# Altium PCB KT603DEMO.PcbDoc
Units mm, origin at the board's own origin, x right, y up, seen from the top; angles counter-clockwise.
Board outline 57.89 x 27.2 mm, 2 copper layers (Top Layer, Bottom Layer); 56 components, 52 nets, 179 pads, 88 vias.
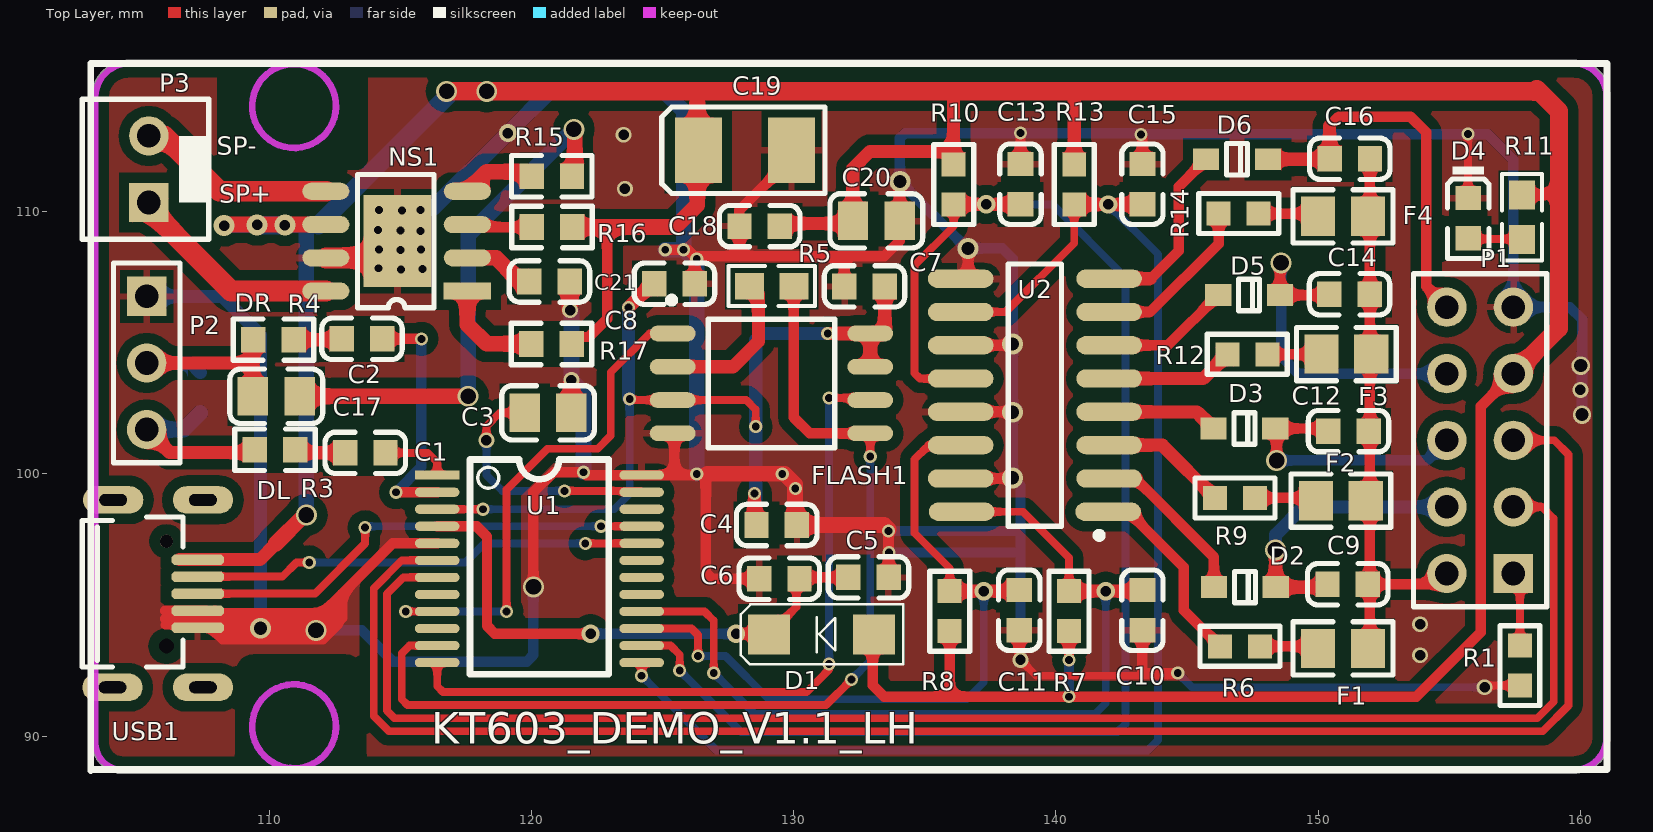
[diagram p0: Top Layer view]
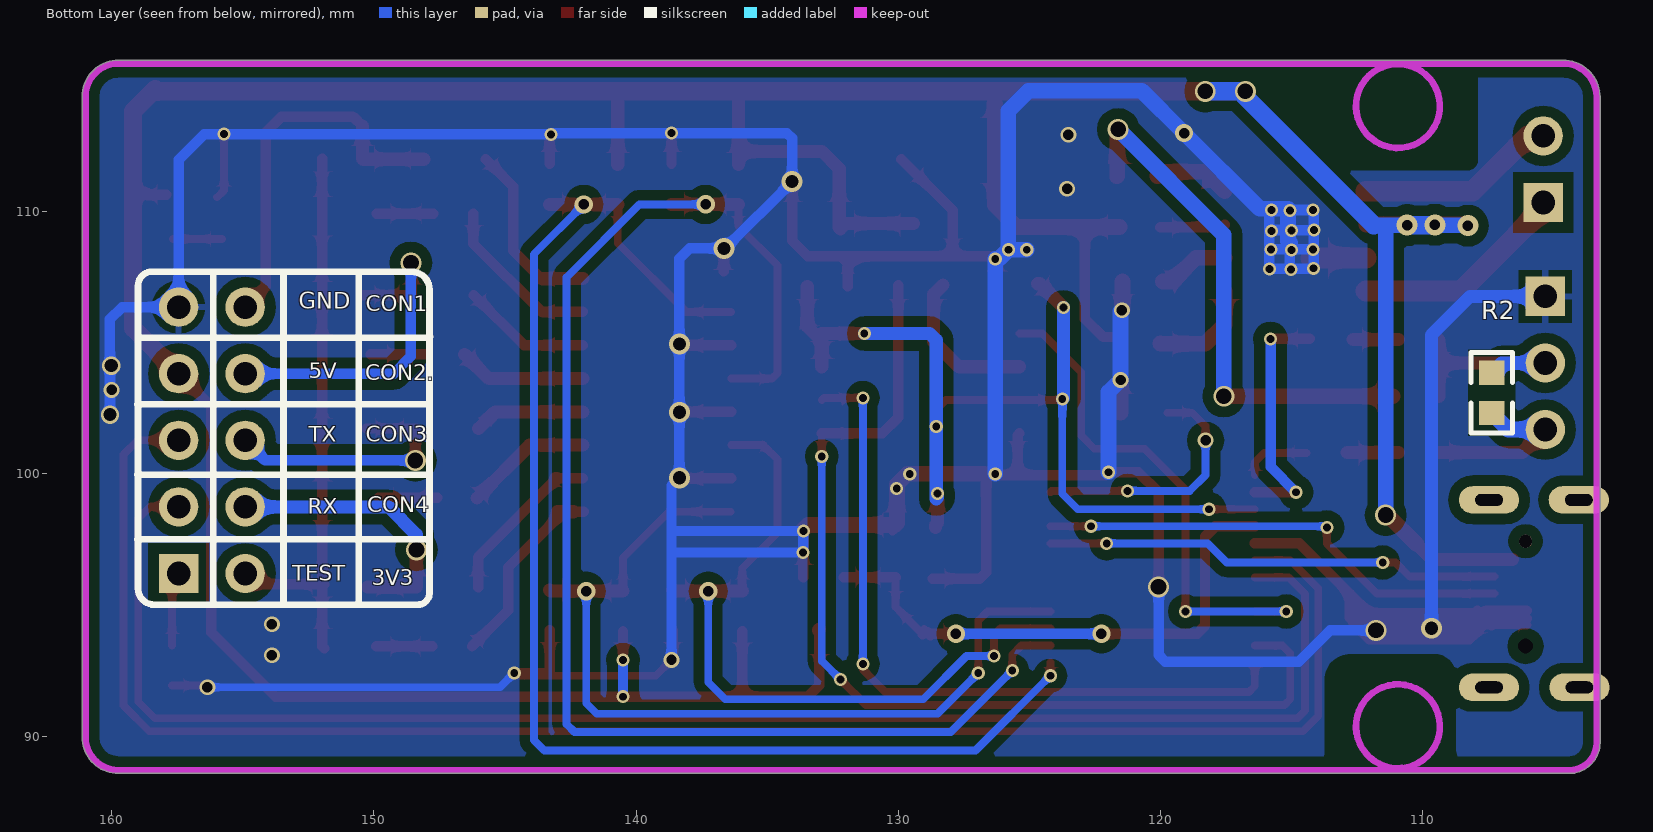
[diagram p1: Bottom Layer view, seen from below]
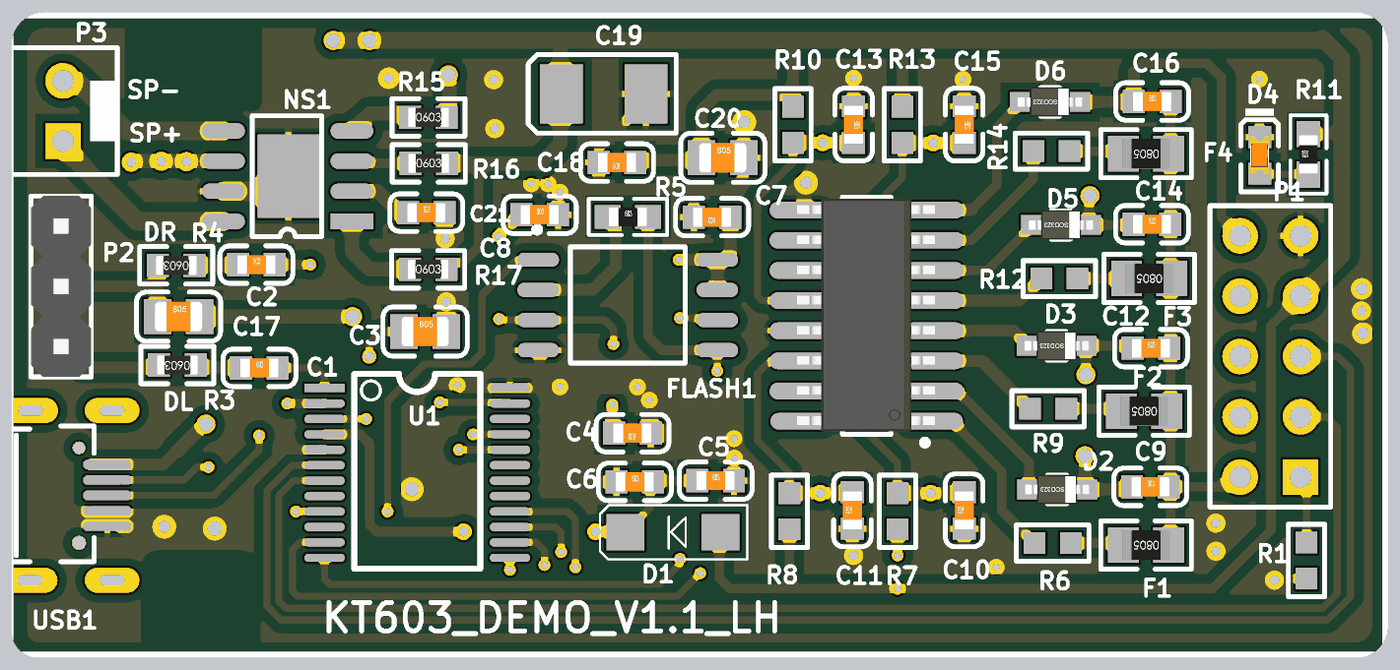
[diagram p2: 3D render of the assembled board from above, using the file's embedded part models]

## Layer stack, top to bottom
Top Solder: solder mask 0.0102, Solder Resist, Dk 3.5
Top Layer: signal copper 0.0356
Dielectric 1: dielectric 0.32, FR-4, Dk 4.8
Bottom Layer: signal copper 0.0356
Bottom Solder: solder mask 0.0102, Solder Resist, Dk 3.5

## Board outline
103.233,89.74 ccw(c104.4,89.74) 104.4,88.573 159.75,88.573 ccw(c159.75,89.95) 161.127,89.95 161.127,114.4 ccw(c159.75,114.4) 159.75,115.777 104.63,115.777 ccw(c104.63,114.38) 103.233,114.38

## Design rules (kind name [scope] priority, off if disabled: settings)
Clearance Clearance-poly [InPolygon] p1: gap=0.4
Clearance Clearance-track [All] p2: gap=0.2
PolygonConnect PolygonConnect_via [IsVia] p1: connectstyle=Direct reliefconductorwidth=0.254 reliefentries=4 polygonreliefangle="90 Angle" airgapwidth=0.254
PolygonConnect PolygonConnect_pad [All] p2: connectstyle=Relief reliefconductorwidth=0.254 reliefentries=4 polygonreliefangle="90 Angle" airgapwidth=0.254
RoutingVias [All] p1: holewidth=0.3 width=0.5 viastyle="Through Hole" minholewidth=0.3 minwidth=0.5 maxholewidth=2 maxwidth=4
SilkToSolderMaskClearance [IsPad] p1: minsilkscreentomaskgap=0 clearancetoexposedcopper=TRUE
SolderMaskExpansion [All] p1: expansion=0.102
Width [All] p1: maxlimit=2 minlimit=0.3 preferedwidth=0.4
29 further rules are at their usual default settings.

## Components (designator, comment, footprint, x,y, rotation, side; value= is the part's Value field where it differs from the comment)
C1 "10uF" LC-0603_C 113.66,100.8 r0 top
C2 "10uF" LC-0603_C 113.53,105.15 r0 top
C3 "10uF" LC-0805_C 120.63,102.33 r0 top
C4 "10uF" LC-0603_C 129.35,98.05 r180 top
C5 "10uF" LC-0603_C 132.85,96.05 r0 top
C6 "0.1uF" LC-0603_C 129.45,96 r0 top
C7 "10uF" LC-0603_C 132.7,107.15 r180 top
C8 "0.1uF" LC-0603_C 125.45,107.25 r0 top
C9 "104" LC-0603_C 151.13,95.79 r0 top
C10 "104" LC-0603_C 143.3,94.8 r90 top
C11 "104" LC-0603_C 138.6,94.8 r90 top
C12 "104" LC-0603_C 151.16,101.63 r0 top
C13 "104" LC-0603_C 138.65,111.05 r270 top
C14 "104" LC-0603_C 151.2,106.85 r0 top
C15 "104" LC-0603_C 143.3,111.05 r270 top
C16 "104" LC-0603_C 151.21,112.02 r0 top
C17 "0.22uF" LC-0805_C 110.26,102.96 r0 top
C18 "0.1uF" LC-0603_C 128.7,109.45 r180 top
C19 "220uF/16V" CAP-3528 128.14,112.34 r0 top
C20 "10uF" LC-0805_C 133.15,109.65 r0 top
C21 "1uF" LC-0603_C 120.68,107.34 r0 top
D1 "1N4148" 1N4148 130.85,93.85 r180 top
D2 "1N4148" LC-SOD-323 147.21,95.68 r180 top
D3 "1N4148" LC-SOD-323 147.19,101.73 r180 top
D4 "白灯 0603" LC-0603_LED_S1 155.73,109.75 r270 top
D5 "1N4148" LC-SOD-323 147.37,106.82 r180 top
D6 "1N4148" LC-SOD-323 146.91,112 r180 top
F1 "Fuse1" 0805-1 150.95,93.34 r180 top
F2 "Fuse1" 0805-1 150.87,98.98 r180 top
F3 "Fuse1" 0805-1 151.08,104.57 r180 top
F4 "Fuse1" 0805-1 150.95,109.82 r180 top
FLASH1 "W25QXX" SOIC-8W 129.15,103.45 r0 top
NS1 "NS4159" SOIC8 117.55,106.97 r180 top
P1 "Header 5X2" HDR5X2-2.54 157.45,96.2 r90 top
P2 "Header 3" HDR3X1-2.54 105.32,106.77 r270 top
P3 "Header 2" KF2.54-2P 105.4,110.35 r90 top
R1 "0R" R0603 157.7,93.45 r270 top
R2 "0R /R0805 1%" LC-0603_R 107.36,103.09 r90 bottom
R3 "100R /R0805 1%" LC-0603_R 110.21,100.92 r180 top
R4 "100R/R0805 1%" LC-0603_R 110.16,105.12 r180 top
R5 "1K /R0603 5%" 0603-1 129.16,107.16 r0 top
R6 "330R" R0603 146.26,93.42 r0 top
R7 "1K" R0603 140.5,94 r90 top
R8 "1K" R0603 135.95,94 r90 top
R9 "330R" R0603 146.07,99.08 r0 top
R10 "1K" R0603 136.1,111.8 r270 top
R11 "1K" 0603-1 157.78,109.79 r90 top
R12 "330R" R0603 146.54,104.56 r0 top
R13 "1K" R0603 140.7,111.8 r270 top
R14 "330R" R0603 146.21,109.93 r0 top
R15 "18K" LC-0603_R 120.77,111.35 r0 top
R16 "27R /R0805 1%" LC-0603_R 120.781,109.413 r0 top
R17 "27R /R0805 1%" LC-0603_R 120.76,104.95 r0 top
U1 "KT603C" SSOP24 116.4,99.95 r0 top locked
U2 "TLP190-4" SO16 139.2,103 r180 top
USB1 "USB" USB-MK5 105.31,95.43 r270 top

## Footprints (in the part's own frame and the unit in brackets; to place one, negate y for a bottom-side part, rotate by r counter-clockwise, add the part's x,y. Pads: shape width x height; smd on the part's side, far side on the other; paste and mask are expansions set on the pad)
1N4148 [mil]
  rect 62.99x60 smd: 1(-86.89,-1) 2(70.59,-1)
  silkscreen extent -131,-46 113,44
0603-1 [mm] "0603带丝印"
  rect 1.1x1 smd: 1(-0.85,0) 2(0.85,0)
  silkscreen extent -1.65,-0.76 1.65,0.76, body extent -0.8,-0.4 0.8,0.4, height 0.3
0805-1 [mm] "0805带丝印"
  rect 1.3x1.5 smd: 1(-0.95,0) 2(0.95,0)
  silkscreen extent -1.91,-1.02 1.91,1.02, body extent -1,-0.62 1,0.63, height 0.5
CAP-3528 [mm] "钽电容"
  rect 1.8x2.5 smd: 1(-1.778,0) 2(1.778,0)
  silkscreen extent -3.17,-1.65 3.05,1.65, body extent -1.91,-1.4 1.91,1.4, height 1.1
HDR3X1-2.54 [mm] "2.54单排针排座"
  rect 1.5x1.5 hole 0.9: 1(0,0)
  round 1.5 hole 0.9: 2(2.54,0) 3(5.08,0)
  silkscreen extent -1.27,-1.27 6.35,1.27, body extent -1.27,-1.27 6.35,1.27, height 8.54
HDR5X2-2.54 [mm] "2.54双排针排座"
  rect 1.5x1.5 hole 0.9: 1(0,0)
  round 1.5 hole 0.9: 2(0,2.54) 3(2.54,0) 4(2.54,2.54) 5(5.08,0) 6(5.08,2.54) 7(7.62,0) 8(7.62,2.54) 9(10.16,0) 10(10.16,2.54)
  silkscreen extent -1.27,-1.27 11.43,3.81
KF2.54-2P [mm] "KF2.54端子"
  rect 1.5x1.5 hole 0.9: 1(0,0)
  round 1.5 hole 0.9: 2(2.54,0)
  silkscreen extent -1.4,-2.29 3.94,2.54, body extent -1.4,-2.29 3.94,2.54, height 1.5
LC-0603_C [mm]
  rect 0.93x0.98 smd: 1(-0.77,0) 2(0.77,0)
  silkscreen extent -1.53,-0.79 1.54,0.79, body extent -0.8,-0.4 0.8,0.4, height 0.3
LC-0603_LED_S1 [mm]
  rect 0.93x0.98 smd: A(0.77,0) K(-0.77,0)
  silkscreen extent -1.97,-0.79 1.54,0.79, body extent -0.8,-0.4 0.8,0.4, height 0.6
LC-0603_R [mm]
  rect 0.93x0.98 smd: 1(-0.77,0) 2(0.77,0)
  silkscreen extent -1.53,-0.79 1.54,0.79, body extent -0.85,-0.4 0.85,0.4, height 0.56
LC-0805_C [mm]
  rect 1.16x1.47 smd: 1(-0.89,0) 2(0.89,0)
  silkscreen extent -1.77,-1.04 1.77,1.04, body extent -1,-0.62 1,0.63, height 0.77
LC-SOD-323 [mm]
  rect 1x0.83 smd: 1(1.18,0) 2(-1.18,0)
  silkscreen extent -0.4,-0.6 0.4,0.6, body extent -1.35,-0.62 1.35,0.63, height 1.1
R0603 [mil]
  rect 36x36 smd: 1(0,0) 2(60,0)
  silkscreen extent -30,-30 90,30
SO16 [mm]
  oval 2.5x0.7 smd: 1(-2.794,4.445) 2(-2.831,3.175) 3(-2.831,1.905) 4(-2.831,0.635) 5(-2.831,-0.635) 6(-2.831,-1.905) 7(-2.831,-3.175) 8(-2.831,-4.445) 9(2.831,-4.445) 10(2.831,-3.175) 11(2.831,-1.905) 12(2.831,-0.635) 13(2.831,0.635) 14(2.831,1.905) 15(2.831,3.175) 16(2.794,4.445)
  silkscreen extent -2.58,-5 1.02,5.47, body extent -2.88,-4.92 2.92,4.88, height 1.75
SOIC8 [mm]
  rect 1.8x0.65 smd: 1(0,0)
  oval 1.8x0.65 smd: 2(0,-1.27) 3(0,-2.54) 4(0,-3.81) 5(5.4,-3.81) 6(5.4,-2.54) 7(5.4,-1.27) 8(5.4,0)
  rect 2.6x3.51 smd: 9(2.667,-1.905)
  silkscreen extent 1.27,-4.44 4.19,0.64
SOIC-8W [mm] "SPI_FLASH"
  oval 1.75x0.6 smd: 1(-3.768,1.905) 2(-3.768,0.635) 3(-3.768,-0.635) 4(-3.768,-1.905) 5(3.768,-1.905) 6(3.768,-0.635) 7(3.768,0.635) 8(3.768,1.905)
  silkscreen extent -3.93,-2.45 2.41,3.3
SSOP24 [mm]
  rect 1.7x0.35 smd: 1(0,0)
  oval 1.7x0.35 smd: 2(0,-0.65) 3(0,-1.3) 4(0,-1.95) 5(0,-2.6) 6(0,-3.25) 7(0,-3.9) 8(0,-4.55) 9(0,-5.2) 10(0,-5.85) 11(0,-6.5) 12(0,-7.15) 13(7.8,-7.15) 14(7.8,-6.5) 15(7.8,-5.85) 16(7.8,-5.2) 17(7.8,-4.55) 18(7.8,-3.9) 19(7.8,-3.25) 20(7.8,-2.6) 21(7.8,-1.95) 22(7.8,-1.3) 23(7.8,-0.65) 24(7.8,0)
  silkscreen extent 1.25,-7.6 6.55,0.6
USB-MK5 [mm]
  round 0.5 hole 0.5: 0(-2,0.762)
  round 0.5 hole 0.56: 0(2,0.762)
  oct 0.4x2 smd: 1(-1.3,1.95) 2(-0.65,1.95) 3(0,1.95) 4(0.65,1.95) 5(1.3,1.95)
  oval 1.05x2.3 hole 0.45 slot 1.05 at 90 deg: 7(-3.575,2.155) 7(-3.575,-1.27) 7(3.575,2.155) 7(3.575,-1.295)
  silkscreen extent -2.92,-2.44 2.79,1.4

## Part data
C1 C2 C3 C4 C18 C20 C21: library part Cap, "Capacitor"
C5 C19: library part Cap2, "Capacitor"
C6 C7 C8 C9 C10 C11 C12 C13 C14 C15 C16 C17: library part C
D1 D2 D3 D5 D6: library part Diode, "Default Diode"
D4: library part "0603 白灯", "发光二极管"
F1 F2 F3 F4: "保险丝"
FLASH1: "SPI FLASH"
P1 P2: "接插件"
P3: library part Header, "接插件"
R1 R5 R6 R7 R8 R9 R10 R11 R12 R13 R14 R15 R16 R17: library part Res2, "Resistor"
R2 R3 R4: library part RES2
U1: library part AC24-TTS
U2: library part TLP290-4

## Via types
v1: diameter 0.5, hole 0.3, Top Layer to Bottom Layer, 50 vias
v2: diameter 0.8, hole 0.6, Top Layer to Bottom Layer, 10 vias
v3: diameter 0.6, hole 0.4, Top Layer to Bottom Layer, 10 vias
v4: diameter 0.7, hole 0.4, Top Layer to Bottom Layer, 7 vias
v5: diameter 0.8, hole 0.5, Top Layer to Bottom Layer, 6 vias
v6: diameter 0.8, hole 0.4, Top Layer to Bottom Layer, 3 vias
v7: diameter 0.7, hole 0.5, Top Layer to Bottom Layer, 2 vias

## Nets (pads, with @x,y where several pads share a name; then routed paths per layer and width w, separated by ;. In a path a pad name is that pad's centre, name@x,y a point inside that pad or via, vN(x,y) a via of type N, cw(c..) or ccw(c..) an arc to the next point about the centre after c; other vN are vias at no path point)
3V3: C9.2 C12.2 C14.2 C16.2 F1.1 F2.1 F3.1 F4.1 P1.2 | length 21.9
  Top Layer w0.4: F1.1 151.98,93.42 C9.2@151.98,95.79 ; C9.2 C9.2@151.98,95.79 ; C16.2 C9.2@151.98,95.79 ; P1.2 154.5,95.79 C9.2@151.98,95.79
CLK_2: U1.17
CON_IO1: C16.1 D6.2 P1.10 | length 14.7
  Top Layer w0.4: 150.44,113.27 150.8,113.63 153.52,113.63 154.12,113.03 154.12,107.15 P1.10
  Top Layer w0.5: D6.2 C16.1@150.42,112 ; C16.1 150.44,113.27
CON_IO2: C14.1 D5.2 P1.8 | length 13.3
  Top Layer w0.4: v2(148.59,108.05) 148.55,108.01 D5.2 C14.1@150.4,106.82
  Bottom Layer w0.4: v2(148.59,108.05) 148.59,104.48 149.25,103.82 P1.8
CON_IO3: C12.1 D3.2 P1.6 | length 10
  Top Layer w0.4: v2(148.42,100.51) 148.42,101.68 D3.2 C12.1@150.29,101.73
  Bottom Layer w0.4: v2(148.42,100.51) 154.14,100.51 P1.6
CON_IO4: C9.1 D2.2 P1.4 | length 10.8
  Top Layer w0.5: v2(148.38,97.1) 148.38,95.69 D2.2 C9.1@150.25,95.68
  Bottom Layer w0.5: v2(148.38,97.1) 148.38,97.68 149.44,98.74 P1.4
DACLOUT: P2.3 R2.1 R3.2 | length 6.7
  Top Layer w0.5: P2.3 106.2,100.81 R3.2@109.39,100.81
  Bottom Layer w0.6: P2.3 106.73,101.69 R2.1
DACOUT: C17.1 P2.2 R2.2 R4.2 | length 9.7
  Top Layer w0.5: P2.2 109.37,104.23 C17.1 109.37,105.1 R4.2
  Bottom Layer w0.5: P2.2 106.99,104.23 R2.2
DAT_2: U1.19
IO1: C15.2 R13.2 U1.13 U2.10 | length 52.3
  Top Layer w0.3: v1(124.2,92.3) U1.13 ; U2.10 138.075,106.175 140.7,108.8 R13.2
  Top Layer w0.5: R13.2 v4(141.998,110.276) C15.2@143.296,110.276
  Bottom Layer w0.3: v1(124.2,92.3) 127.05,89.45 143.5,89.45 143.9,89.85 143.9,108.374 v4(141.998,110.276)
IO2: C13.2 R10.2 U1.14 U2.12 | length 55.2
  Top Layer w0.3: U1.14 125.3,93.45 125.65,93.1 v1(125.65,92.5) ; R10.2 136.1,109.45 134.6,107.95 134.6,103.85 134.815,103.635 U2.12
  Top Layer w0.5: R10.2@136.104,110.28 v4(137.35,110.28) C13.2
  Bottom Layer w0.3: v1(125.65,92.5) 128,90.15 142.35,90.15 142.65,90.45 142.65,107.5 139.87,110.28 v4(137.35,110.28)
IO3: C11.2 R8.2 U1.15 U2.14 | length 28.6
  Top Layer w0.3: U1.15 126.1,94.1 126.35,93.85 v1(126.35,93.05) ; R8.2 135.95,96.4 134.6,97.75 134.6,100.55 135.145,101.095 U2.14
  Top Layer w0.5: R8.2 v4(137.25,95.524) 138.554,95.524 C11.2
  Bottom Layer w0.3: v1(126.35,93.05) 127.4,93.05 129.05,91.4 136.6,91.4 137.25,92.05 v4(137.25,95.524)
IO4: C10.2 R7.2 U1.16 U2.16 | length 33.8
  Top Layer w0.3: U1.16 126.6,94.75 126.95,94.4 v1(126.95,92.4) ; U2.16 138.745,98.555 140.5,96.8 R7.2
  Top Layer w0.5: R7.2 v4(141.9,95.524) 143.254,95.524 C10.2
  Bottom Layer w0.3: v1(126.95,92.4) 128.5,90.85 141.5,90.85 141.9,91.25 v4(141.9,95.524)
KT603_TEST: P1.1 R1.1 | length 2.9
  Top Layer w0.3: P1.1 157.7,95.95 R1.1
KT_3V3: C4.2 C7.1 C8.1 FLASH1.3 FLASH1.7 FLASH1.8 U1.3 | length 37.1
  Top Layer w0.3: U1.3 v1(118.15,98.65) ; v1(123.742,102.858) 123.785,102.815 FLASH1.3 128.185,102.815 128.55,102.45 v1(128.55,101.8)
  Top Layer w0.5: v1(123.7,106.35) 124.6,107.25 C8.1 ; v1(128.5,99.25) 128.5,98.13 C4.2 C4.2@128.58,97.95 ; v1(131.295,105.355) FLASH1.8 ; FLASH1.7 132.918,105.068 133.47,105.62 C7.1
  Bottom Layer w0.3: v1(118.15,98.65) 123.15,98.65 123.742,99.242 v1(123.742,102.858)
  Bottom Layer w0.5: v1(123.7,106.35) 123.7,102.9 v1(123.742,102.858) ; v1(128.5,99.25) 128.5,99.1 128.55,99.05 v1(128.55,101.8) 128.55,105.1 128.805,105.355 v1(131.295,105.355)
MP3_5V: C18.1 C19.1 C20.1 D1.1 NS1.6 P1.7 R7.1 R8.1 R10.1 R11.2 R13.1 R16.2 R17.2 USB1.1 | length 160.1
  Top Layer w0.4: R17.2@121.55,105.22 122.18,105.22 122.88,105.92 122.88,109.413 ; D1.1@133.007,94.075 133.007,91.943 133.45,91.5 135.95,91.5 ; R8.1 135.95,91.5 ; v1(140.5,92.9) R7.1 ; P1.7 156.2,102.57 156.2,93.96 153.74,91.5 v1(140.5,91.5) 135.95,91.5 ; R11.2@157.92,110.64 158.74,110.64 ; 159.1,110.64 158.85,110.64 ; 159.19,110.3 158.85,110.64 ; 159.19,111.11 159.19,111.09 158.74,110.64 ; 158.74,110.64 158.85,110.64
  Top Layer w0.5: USB1.1@106.58,96.73 109.64,96.73 110.22,97.31 ; C18.1@129.42,109.55 132.01,109.55 132.21,109.35 132.25,109.39 132.25,111.64 132.91,112.3 136.1,112.3 R10.1 136.1,114.56 ; D1.1@133.007,94.075 D1.1@133.05,94.032 ; R13.1 140.7,114.54
  Top Layer w0.6: v6@108.312,109.51 NS1.6 ; 110.22,97.31 111.34,98.43 v2(111.41,98.43) ; R16.2 122.88,109.413 125.483,109.413 126.322,110.252 126.322,114.56
  Top Layer w0.7: v2(116.76,114.59) v2(118.29,114.59) 158.23,114.59 158.24,114.58 158.34,114.68 159.19,113.83 159.19,111.11 ; P1.7 159.19,105.56 159.19,110.3 159.19,111.09
  Bottom Layer w0.4: v1(140.5,91.5) v1(140.5,92.9)
  Bottom Layer w0.6: v6@108.289,109.487 109.53,109.487 v6(109.53,109.5) ; v6(110.589,109.487) 111.867,109.487 ; v2(111.41,98.43) 111.41,109.487
  Bottom Layer w0.7: v6(109.53,109.5) 109.543,109.487 v6@110.33,109.487 ; 111.867,109.487 116.76,114.38 v2(116.76,114.59) v2(118.29,114.59)
  other v6: 108.269,109.467
MP3_GND: C3.2 C4.1 C5.2 C6.1 C7.2 C8.2 C10.1 C11.1 C13.1 C15.1 C18.2 C19.2 C20.2 C21.2 D4.K FLASH1.4 NS1.7 NS1.9 P1.9 P2.1 R1.2 U1.5 U1.24 U2.9 U2.11 U2.13 U2.15 USB1.4 USB1.5 | length 273.2
  Top Layer w0.3: 105.99,94.23 107.36,94.23 USB1.5@107.62,94.23 ; 107.53,94.47 cw(c107.53,94.38) 107.62,94.38 107.62,94.32 107.62,94.3 USB1.5@107.62,94.23 ; USB1.5@107.88,94.04 107.88,94.1 cw(c107.91,94.1) 107.91,94.13 ccw(c107.81,94.13) 107.81,94.23 107.69,94.23 USB1.5@107.62,94.23 ; v3(138.65,92.9) 139.25,92.3 144.55,92.3 v1(144.65,92.4) ; v1(155.72,112.96) 155.72,110.81 D4.K@155.98,110.55 ; v3@156.416,91.926 R1.2
  Top Layer w0.4: 106.02,94.47 107.12,94.47 ; 106.03,94.78 107.53,94.78 cw(c107.53,94.47) 107.84,94.47 ; 106.14,94.61 ccw(c106.28,94.61) 106.28,94.47 ; USB1.5@107.36,94.23 USB1.5@107.27,94.32 ; USB1.5@107.91,94.13 USB1.5@108.01,94.03 ; USB1.4@107.91,94.78 108.015,94.675 112.025,94.675 ; 108.11,93.82 cw(c108.11,93.4) 108.241,93.799 ; U1.5 114.7,97.35 112.775,95.425 ; v2(120.07,95.69) 120.07,99.29 120.84,100.06 v1(121.98,100.06) 122.09,99.95 U1.24 125.45,99.95 ; v1(125.1,108.55) v1(125.8,108.55) 125.95,108.55 v1@126.22,108.28 ; FLASH1.4 125.45,101.477 125.45,99.95 ; C8.2 v1@126.22,108.28 ; v1(126.3,100) v1@126.35,99.95 ; v1(126.3,108.2) v1@126.22,108.28 ; C6.1 126.9,96 126.65,96.25 126.65,99.95 v1@126.35,99.95 ; C19.2@129.878,112 127.93,110.052 C18.2 127.93,108.3 ; C4.1@130.05,98.12 C4.1 130.12,97.95 C4.1@130.22,97.85 ; C7.2 131.93,107.92 ; C5.2 v1@133.62,97.88 ; v5@134.04,111.14 C20.2 134.04,108.89 133.45,108.3 132.2,108.3 ; U2.15 v5@138.325,99.825 ; U2.13 v5@138.335,102.365 ; U2.11 v5@138.305,104.905 ; U2.9@136.65,107.726 v5(136.65,108.6) ; v3@138.6,92.95 C11.1 ; C13.1 v1(138.65,113) ; C10.1 143.3,92.4 v1(144.65,92.4) ; C15.1 v1@143.3,112.9 ; 107.12,94.47 USB1.5@107.27,94.32 ; 107.12,94.47 107.53,94.47 107.84,94.47 ; USB1.5@107.27,94.32 USB1.5@107.6,94.32 ; USB1.5@107.6,94.32 107.62,94.3 107.69,94.23 107.88,94.04 108.22,93.7 108.34,93.7 ; USB1.5@107.6,94.32 107.62,94.32 111.49,94.32 v2(111.78,94.03) ; 107.84,94.47 111.74,94.47 v2@111.78,94.43 ; USB1.5@108.01,94.03 108.241,93.799 ; USB1.5@108.01,94.03 v2(111.78,94.03) ; 108.241,93.799 cw(c108.11,93.4) 108.404,93.7 ; 108.241,93.799 108.34,93.7 ; 108.34,93.7 108.404,93.7 ; 108.404,93.7 111.45,93.7 ; 111.45,93.7 v2(111.78,94.03) ; 111.45,93.7 112.03,93.7 112.635,94.305 112.635,94.365 ; v2(111.78,94.03) v2@111.78,94.43 ; v2(111.78,94.03) 112.775,95.025 ; v2(111.78,94.03) 112.3,94.03 112.635,94.365 ; v2@111.78,94.43 112.025,94.675 ; 112.025,94.675 112.775,95.425 ; 112.635,94.365 112.775,94.505 112.775,95.025 ; 112.775,95.025 112.775,95.425 ; 125.45,99.95 v1@126.35,99.95 ; v1@126.22,108.28 126.22,108.3 127.93,108.3 ; 127.93,108.3 131.55,108.3 ; 131.55,108.3 132.2,108.3 ; 131.55,108.3 131.93,107.92 ; 131.93,107.92 131.93,108.03 132.2,108.3
  Top Layer w0.6: v3@121.45,106.26 C21.2 ; C3.2 v3(121.52,103.58) ; 126.65,99.95 126.7,100 129.65,100 130.05,99.6 C4.1@130.05,98.12 ; C4.1 133.45,98.05 v1@133.62,97.88
  Top Layer w0.8: NS1.7 NS1.9@114.248,108.24
  Bottom Layer w0.3: v1(144.65,92.4) 145.19,91.86 v3(156.35,91.86)
  Bottom Layer w0.4: v2(111.78,94.03) 113.53,94.03 114.72,92.84 119.82,92.84 120.07,93.09 v2(120.07,95.69) ; v1(114.14,109.3) v1@114.16,109.3 ; v1(114.18,108.56) v1@115.06,108.56 ; v1(115.02,107.8) v1@115.04,107.82 ; v1@115.74,110.04 v1(115.76,110.06) ; v1(115.76,109.26) 115.72,109.3 115.131,109.3 v1@115.06,109.3 ; v1(115.78,108.56) v1@115.06,108.56 ; v1(125.8,108.55) v1@125.95,108.55 ; v1@133.62,97.02 v1(133.62,97.82) 138.63,97.82 ; v1(133.64,97) 138.61,97 ; v5@134.1,111.15 v5(134.05,111.15) ; v3(138.65,92.9) 138.65,99.55 v5(138.35,99.85) v5(138.35,102.35) v5(138.35,104.95) 138.35,108.2 137.95,108.6 v5(136.65,108.6) 136.6,108.6 v5(134.05,111.15) ; v1@143.2,113 v1(138.65,113) 134.25,113 134.05,112.8 v5(134.05,111.15) ; v1(143.25,112.95) 156.48,112.95 157.45,111.98 P1.9 159.6,106.36 160.07,105.89 v7(160.07,102.26) ; v1@114.16,109.3 v1@115.06,109.3 ; v1@114.16,109.3 v1(114.16,107.84) 114.18,107.82 v1@115.04,107.82 ; v1@114.16,109.3 114.16,110.04 v1(114.18,110.06) v1@115.08,110.06 ; v1@115.04,107.82 v1(115.84,107.82) 115.84,109.98 v1(115.76,110.06) ; v1@115.04,107.82 115.06,107.84 v1@115.06,108.56 ; v1@115.06,108.56 115.06,108.81 v1@115.06,109.3 ; v1@115.06,109.3 v1(115.06,110.04) v1@115.08,110.06 ; v1@115.08,110.06 115.131,110.06 v1(115.76,110.06)
  Bottom Layer w0.5: P2.1 108.19,106.77 109.66,105.3 v5(109.66,94.11)
  Bottom Layer w0.6: 115.06,108.81 115.131,108.881 115.131,109.3 115.131,110.06 v1@115.131,110.111 ; v1@115.08,110.06 v1@115.131,110.111 ; v3@121.52,106.19 v3(121.52,103.58) 121.98,103.12 v1(121.98,100.06) ; v1(125.1,108.55) v1(125.8,108.55) ; v1(126.3,100) v1(126.3,108.2) 126.15,108.2 v1(125.8,108.55) ; v1@115.131,110.111 116.211,110.111 v4(119.1,113) 120.71,114.61 125.03,114.61 125.8,113.84 v1(125.8,108.55)
  other v1: 130.06,99.44 129.56,100 115,108.54 115,109.28
  other v3: 153.89,93.08 153.89,94.26 160.01,103.2 121.47,106.24 123.56,110.88 123.51,112.94
  other v7: 160.02,104.13
MP3_RX: P1.3 U1.7 | length 60.2
  Top Layer w0.3: U1.7 115.11,96.05 114.48,95.42 114.48,90.97 114.77,90.68 158.363,90.68 158.99,91.307 158.99,98.29 158.54,98.74 P1.3
MP3_TX: P1.5 U1.6 | length 65.8
  Top Layer w0.3: U1.6 115.053,96.7 113.98,95.627 113.98,90.763 114.563,90.18 158.57,90.18 159.55,91.16 159.55,100.74 159.01,101.28 P1.5
NetC1_1: C1.1 R3.1 | length 1.9
  Top Layer w0.5: R3.1@110.93,100.81 C1.1@112.88,100.81
NetC1_2: C1.2 U1.1 | length 2.6
  Top Layer w0.3: C1.2 116.04,100.8 116.4,100.44 U1.1
NetC2_1: C2.1 R4.1 | length 1.7
  Top Layer w0.5: R4.1 C2.1@112.65,105.12
NetC2_2: C2.2 U1.2 | length 9.3
  Top Layer w0.4: C2.2 v1(115.8,105.15) ; v1(114.83,99.3) U1.2
  Bottom Layer w0.4: v1(114.83,99.3) 115.8,100.27 v1(115.8,105.15)
NetC3_1: C3.1 U1.23 | length 9.7
  Top Layer w0.3: v3(118.28,101.28) 118.28,101.82 118.79,102.33 C3.1 ; v1(121.25,99.35) 124.15,99.35 U1.23
  Bottom Layer w0.3: v3(118.28,101.28) 118.28,99.95 118.88,99.35 v1(121.25,99.35)
NetC5_1: C5.1 C6.2 D1.2 U1.4 | length 21.2
  Top Layer w0.3: D1.2@128.882,93.95 D1.2@129.007,94.075 ; D1.2 130.1,94.918 C6.2@130.1,96.05
  Top Layer w0.4: U1.4 117.9,98 118.3,97.6 118.3,94.2 118.6,93.9 v4(122.25,93.9) ; v4(127.8,93.9) 128.732,93.9 128.782,93.85 128.882,93.95 128.982,93.95 D1.2 ; C6.2@130.1,96.05 C5.1
  Bottom Layer w0.4: v4(122.25,93.9) v4(127.8,93.9)
NetC17_2: C17.2 R15.2 | length 20.1
  Top Layer w0.5: R15.2@121.651,111.363 R15.2@121.701,111.313
  Top Layer w0.6: C17.2 v2(117.58,102.96) ; v2(121.61,113.14) 121.651,113.099 R15.2@121.651,111.363
  Bottom Layer w0.6: v2(117.58,102.96) 117.58,109.11 v2(121.61,113.14)
NetC21_1: C21.1 NS1.2 | length 2.7
  Top Layer w0.6: NS1.2 118.64,108.24 119.54,107.34 C21.1
NetD2_1: D2.1 U2.2 | length 6.4
  Top Layer w0.4: U2.2 143.025,99.825 146.03,96.82 D2.1
  Top Layer w0.5: U2.2@143.025,99.825 U2.2@143.075,99.825
NetD3_1: D3.1 U2.4 | length 4.2
  Top Layer w0.5: U2.4 145.375,102.365 D3.1
NetD4_A: D4.A R11.1 | length 1.9
  Top Layer w0.3: D4.A@155.79,108.96 R11.1@157.66,108.96
NetD5_1: D5.1 U2.6 | length 5
  Top Layer w0.4: U2.6 144.275,104.905 D5.1
NetD6_1: D6.1 U2.8 | length 7
  Top Layer w0.4: 143.613,107.445 144.68,108.512 144.68,110.95 D6.1
  Top Layer w0.5: U2.8 143.613,107.445
NetF1_2: F1.2 R6.2 | length 2.1
  Top Layer w0.4: R6.2 F1.2@149.92,93.42
NetF2_2: F2.2 R9.2 | length 2.2
  Top Layer w0.4: R9.2 F2.2@149.82,99.08
NetF3_2: F3.2 R12.2 | length 2.1
  Top Layer w0.4: R12.2 F3.2@150.12,104.56
NetF4_2: F4.2 R14.2 | length 2.2
  Top Layer w0.4: R14.2 F4.2@149.89,109.93
NetNS1_1: NS1.1 R17.1 | length 4.1
  Top Layer w0.6: NS1.1 117.55,105.7 118.29,104.96 R17.1@120,104.96 ; R17.1@120,104.96 120.01,104.97 R17.1@120,104.96
NetNS1_3: NS1.3 R16.1 | length 2.5
  Top Layer w0.4: NS1.3 117.647,109.413 R16.1
NetNS1_4: NS1.4 R15.1 | length 2.9
  Top Layer w0.6: NS1.4 118.29,111.52 119.955,111.52 R15.1@120.111,111.363
NetR6_1: R6.1 U2.1 | length 8
  Top Layer w0.4: U2.1 142.765,98.555 144.88,96.44 144.88,94.8 R6.1
  Top Layer w0.5: U2.1@142.395,98.555 U2.1@142.995,98.555
NetR9_1: R9.1 U2.3 | length 4.9
  Top Layer w0.5: U2.3 144.055,101.095 R9.1
NetR12_1: R12.1 U2.5 | length 4.9
  Top Layer w0.5: U2.5 145.615,103.635 R12.1
NetR14_1: R14.1 U2.7 | length 6.4
  Top Layer w0.4: U2.7 143.605,106.175 146.21,108.78 R14.1
SD_CMD_2: U1.18
SP+: NS1.8 P3.1 | length 8.3
  Top Layer w0.8: P3.1 105.4,110.11 108.54,106.97 NS1.8
SP-: NS1.5 P3.2 | length 7.6
  Top Layer w0.8: P3.2 105.98,112.89 108.09,110.78 NS1.5
SPI_CLK_2: FLASH1.6 U1.12 | length 28.3
  Top Layer w0.3: U1.12 116.4,91.9 116.62,91.68 130.495,91.68 131.35,92.535 v1(131.35,92.75) ; v1(131.35,102.9) 132.833,102.9 FLASH1.6
  Bottom Layer w0.3: v1(131.35,92.75) v1(131.35,102.9)
SPI_CS_2: FLASH1.1 U1.9 | length 19.9
  Top Layer w0.3: v1(115.2,94.75) U1.9 ; v1(119.05,94.75) 119.05,99.4 120.61,100.96 122.52,100.96 123.02,101.46 123.02,103.87 124.505,105.355 FLASH1.1
  Bottom Layer w0.3: v1(115.2,94.75) v1(119.05,94.75)
SPI_DI: FLASH1.2 R5.1 | length 6
  Top Layer w0.5: FLASH1.2 127.685,104.085 128.65,105.05 128.65,106.85 R5.1@128.3,107.2
SPI_DO_2: FLASH1.5 R5.2 U1.11 | length 38.8
  Top Layer w0.3: U1.11 115.35,93.45 115.05,93.15 115.05,91.4 115.27,91.18 131.23,91.18 v1(132.2,92.15) ; v1(132.918,100.668) FLASH1.5
  Top Layer w0.4: R5.2@130,107.2 130,102.15 130.605,101.545 FLASH1.5
  Bottom Layer w0.3: v1(132.2,92.15) 132.918,92.868 v1(132.918,100.668)
USB+: U1.21 USB1.3 | length 18.4
  Top Layer w0.3: USB1.3 111.74,95.43 113.65,97.34 v1(113.65,97.95) ; v1(122.65,98) U1.21
  Bottom Layer w0.3: v1(113.65,97.95) 113.7,98 v1(122.65,98)
USB-: U1.20 USB1.2 | length 17.5
  Top Layer w0.3: USB1.2 110.49,96.08 111.03,96.62 v1(111.52,96.62) ; v1(122.05,97.35) U1.20
  Bottom Layer w0.3: v1(111.52,96.62) 117.472,96.62 118.202,97.35 v1(122.05,97.35)
pads on no net: U1.8 U1.10 U1.22 USB1.0 USB1.7

## Polygon pours and split planes (outlines as drawn)
MP3_GND on Bottom Layer "Top Layer-No Net 1" (solid, remove dead copper, pour order 10): 103.42,113.61 103.42,114.44 cw(c104.63,114.44) 104.63,115.65 107.67,115.65 cw(c107.67,115.45) 107.87,115.45 107.87,111.96 ccw(c108.26,111.96) 108.26,111.57 113.04,111.57 ccw(c113.04,112.58) 114.05,112.58 114.05,115.38 cw(c114.36,115.38) 114.36,115.69 159.77,115.69 cw(c159.77,114.38) 161.08,114.38 161.08,90.25 cw(c159.53,90.25) 159.53,88.7 114.45,88.7 cw(c114.45,89.39) 113.76,89.39 113.76,92.14 ccw(c112.77,92.14) 112.77,93.13 109.63,93.13 ccw(c109.545,92.295) 108.71,92.38 108.71,89.45 cw(c107.805,89.535) 107.72,88.63 104.47,88.63 cw(c104.47,89.74) 103.36,89.74 103.36,113.68
MP3_GND on Top Layer "Top Layer-No Net 1" (solid, remove dead copper, pour order 12): 103.44,109.97 103.44,114.46 cw(c104.63,114.46) 104.63,115.65 107.75,115.65 cw(c107.75,115.4) 108,115.4 108,111.97 ccw(c108.38,111.97) 108.38,111.59 113.34,111.59 ccw(c113.34,112.02) 113.77,112.02 113.77,115.24 cw(c114.21,115.24) 114.21,115.68 159.82,115.68 cw(c159.82,114.4) 161.1,114.4 161.1,90.2 cw(c159.64,90.2) 159.64,88.74 114.42,88.74 cw(c114.42,89.45) 113.71,89.45 113.71,92.27 ccw(c112.85,92.27) 112.85,93.13 109.43,93.13 ccw(c109.43,92.38) 108.68,92.38 108.68,89.42 cw(c107.91,89.42) 107.91,88.65 104.52,88.65 cw(c104.52,89.83) 103.34,89.83 103.34,113.64 cw(c103.36,113.64) 103.36,113.66

## Keep-outs
Keep-Out Layer:
  lines w0.254: 104.52,88.7 156.88,88.7 159.75,88.7 ccw(c159.75,89.95) 161,89.95 161,114.4 ccw(c159.75,114.4) 159.75,115.65 156.92,115.65 105.98,115.65 104.63,115.65 ccw(c104.63,114.38) 103.36,114.38 103.36,114.31 103.36,89.74 ccw(c104.4,89.74) 104.4,88.7 104.6,88.7 ; 109.809,89.239 cw(c110.94,90.37) 109.82,89.227 ; 109.809,112.899 cw(c110.94,114.03) 109.82,112.887

## Silkscreen, mask and mechanical layers (free items; w line width, h text height)
Top Overlay:
  lines w0.254: 103.19,88.67 103.19,115.65 161.02,115.65 161.02,88.72 103.19,88.72
  text "SP-" at 108,112.177 h0.7
  text "SP+" at 108.08,110.35 h0.7
  text "DR" at 108.68,106.19 h0.7
  text "DL" at 109.51,99.04 h0.7
  text "KT603_DEMO_V1.1_LH" at 116.17,89.71 h1.2
Bottom Overlay:
  lines w0.254: 147.86,105.24 ccw(c147.91,105.24) 147.91,105.19 158.93,105.19 ; 147.88,99.88 cw(c147.97,99.88) 147.97,99.97 159.02,99.97 ; 147.93,97.43 cw(c148,97.43) 148,97.5 159.02,97.5 ; 147.95,102.65 159.02,102.65 ; 150.58,95.02 150.58,107.71 ; 153.45,95.01 153.45,107.71 ; 156.13,95.05 156.13,107.64 ; 147.88,95.45 ccw(c148.32,95.45) 148.32,95.01 158.38,95.01 ccw(c158.38,95.63) 159,95.63 159,107.18 ccw(c158.47,107.18) 158.47,107.71 148.56,107.71 ccw(c148.56,107.03) 147.88,107.03 147.88,95.45
  text "GND" at 152.86,106.29 h0.63
  text "CON1" at 150.31,106.21 h0.6
  text "5V" at 152.49,103.64 h0.6
  text "CON2." at 150.33,103.57 h0.6
  text "CON3" at 150.32,101.23 h0.6
  text "TX" at 152.49,101.22 h0.6
  text "CON4" at 150.25,98.54 h0.6
  text "RX" at 152.52,98.48 h0.6
  text "TEST" at 153.12,95.92 h0.6
  text "3V3" at 150.08,95.75 h0.6